# Altium PCB Blue_Clipper.PcbDoc
Units mil, origin at the board's own origin, x right, y up, seen from the top; angles counter-clockwise.
Board outline 3149.23 x 1200 mil, 2 copper layers (Top Layer, Bottom Layer); 18 components, 10 nets, 39 pads, 79 vias.
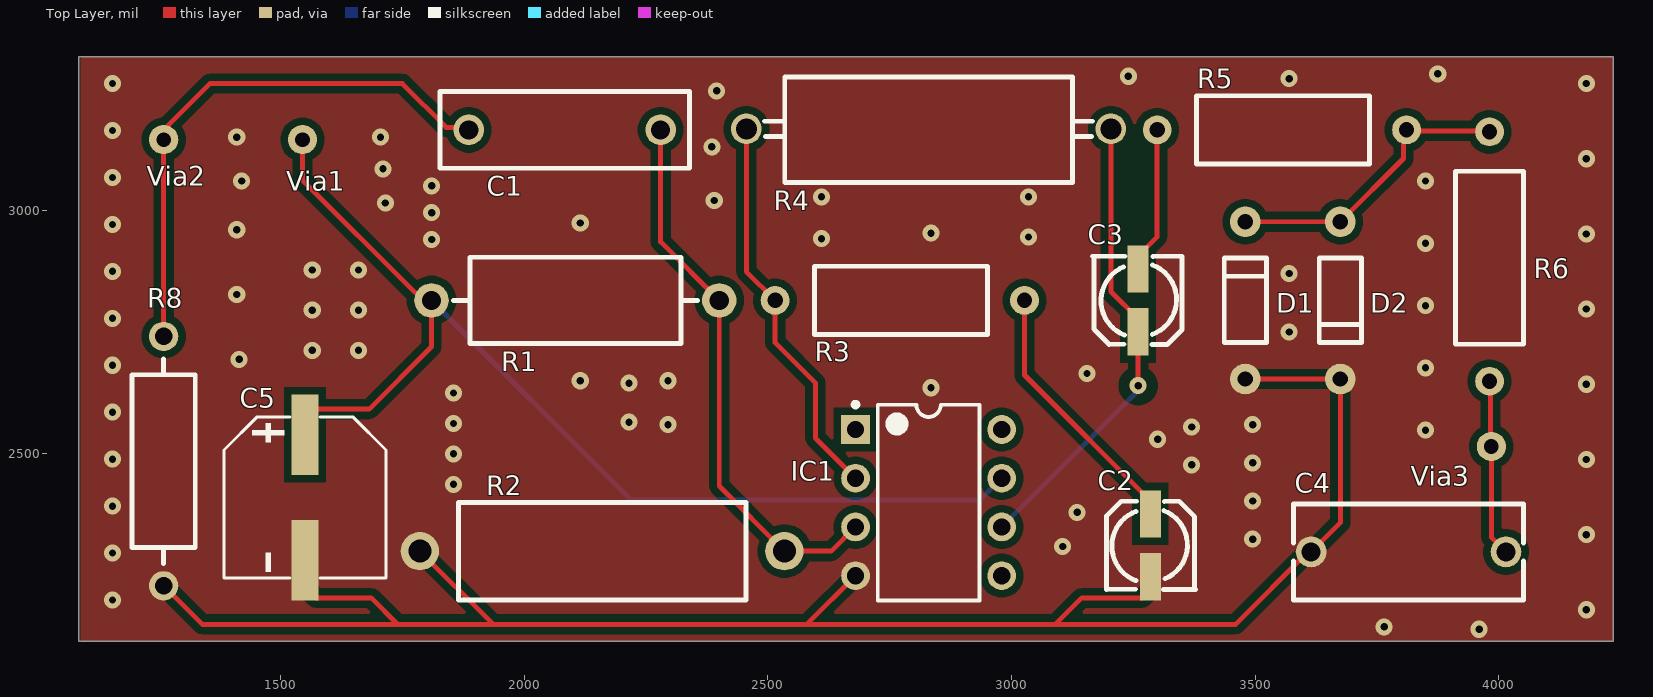
[diagram p0: Top Layer view]
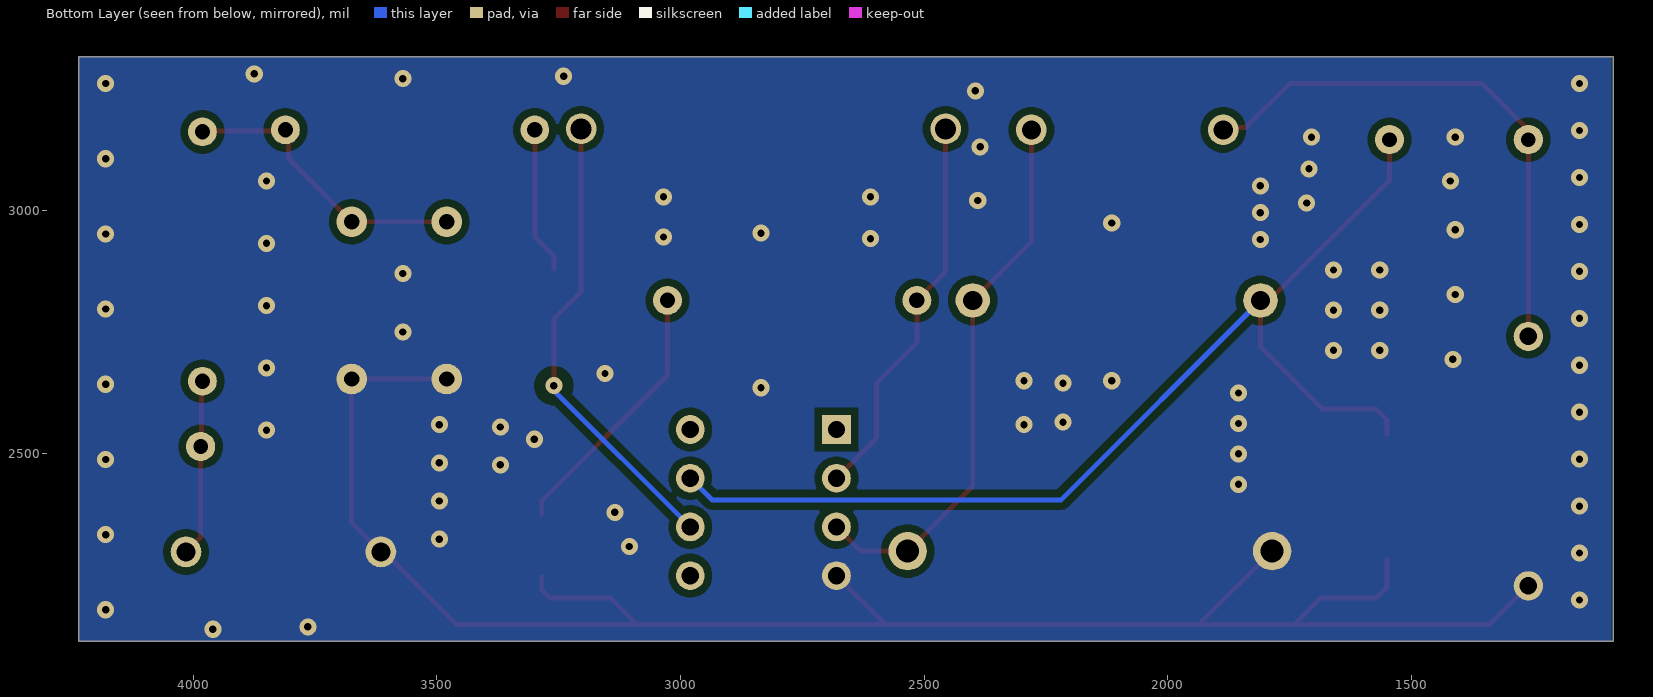
[diagram p1: Bottom Layer view, seen from below]

## Layer stack, top to bottom
Top Solder: solder mask 0.4, Solder Resist, Dk 3.5
Top Layer: signal copper 1.4
Dielectric 1: dielectric 12.6, FR-4, Dk 4.8
Bottom Layer: signal copper 1.4
Bottom Solder: solder mask 0.4, Solder Resist, Dk 3.5

## Board outline
1085.77,2115 1085.77,3315 4235,3315 4235,2115

## Design rules (kind name [scope] priority, off if disabled: settings)
Clearance [All] p1: gap=10 ignorepadtopadclearanceinfootprint=FALSE except(15: Arc-Poly Track-Poly SMDPad-Poly THPad-Poly Via-Poly Fill-Poly Poly-Poly)
PolygonConnect [All] p1: connectstyle=Direct reliefconductorwidth=10 reliefentries=4 polygonreliefangle="90 Angle" airgapwidth=10
RoutingVias [All] p1: holewidth=28 width=50 viastyle="Through Hole" minholewidth=28 minwidth=50 maxholewidth=28 maxwidth=50
SMDNeckDown [All] p1: percent=50.000
SilkToSilkClearance [All] p1: silktosilkclearance=0
SilkToSolderMaskClearance [IsPad] p1: minsilkscreentomaskgap=0 clearancetoexposedcopper=TRUE
SolderMaskExpansion [All] p1: expansion=4 istentingtop=FALSE
SupplyNets "Schematic Supply Nets" [InNet('GND')] p1: voltage=0.000
Width [All] p1: maxlimit=100 minlimit=6 preferedwidth=10
28 further rules are at their usual default settings.

## Components (designator, comment, footprint, x,y, rotation, side; value= is the part's Value field where it differs from the comment)
C1 "47nF" 47nF 2083.15,3165 r0 top
C2 "4.7uF" 4.7uF 3285,2312.28 r90 top
C3 "4.7uF" 4.7uF 3260,2814.99 r270 top
C4 "33nF" 33nF 3815,2298.7 r0 top
C5 "100uF" 100nF 1550,2410.58 r270 top
D1 "1N914BTR" DO-35_BD2.0-L4.2-P8.20-D0.5-RD 3480,2815 r270 top
D2 "1N914BTR" DO-35_BD2.0-L4.2-P8.20-D0.5-RD 3675,2815 r90 top
IC1 "TL071ACP" P0008A 2830,2400 r0 top
R1 "200kΩ" 200K 2105,2814.8 r180 top
R2 "240kΩ" 240K 2160,2300.28 r0 top
R3 "150Ω" 150 2770.9,2815 r0 top
R4 "150kΩ" 150K 2830,3166.97 r180 top
R5 "8.2kΩ" 8K2 3555,3165 r0 top
R6 "10kΩ" 10K 3981.22,2905 r270 top
R8 "2.2MΩ" 2.2M 1260,2485.18 r90 top
Via1 "9V positive" PCBComponent_1 1545,3145 r90 top
Via2 "Footswith1" PCBComponent_1 1260,3145 r90 top
Via3 "Footswitch2" PCBComponent_1 3985,2515 r90 top

## Footprints (in the part's own frame and the unit in brackets; to place one, negate y for a bottom-side part, rotate by r counter-clockwise, add the part's x,y. Pads: shape width x height; smd on the part's side, far side on the other; paste and mask are expansions set on the pad)
2.2M [mil] "2.2M"
  round 60 hole 36: 1(-255.91,0) 2(255.9,0)
  silkscreen extent -210,-65 210,65
4.7uF [mm]
  rect 2.46x1.1 smd: 1(1.64,0) 2(-1.64,0)
  silkscreen extent -2.3,-2.37 2.3,2.29
8K2 [mm]
  round 1.5 hole 0.8: 1(-6.5,0) 2(6.5,0)
  silkscreen extent -4.44,-1.78 4.57,1.78
10K [mm]
  round 1.5 hole 0.8: 1(-6.5,0) 2(6.5,0)
  silkscreen extent -4.44,-1.78 4.57,1.78
33nF [mm]
  round 1.6 hole 1: 1(-5.08,0) 2(5.08,0)
  silkscreen extent -6,-2.5 6,2.5
47nF [mm]
  round 1.6 hole 1: 1(-5,0) 2(5,0)
  silkscreen extent -6.5,-2 6.5,2
100nF [mm]
  rect 4.2x1.4 smd: 1(-3.267,0) 2(3.267,0)
  silkscreen extent -4.2,-4.23 4.2,4.23
150 [mm]
  round 1.5 hole 0.8: 1(-6.5,0) 2(6.5,0)
  silkscreen extent -4.44,-1.78 4.57,1.78
150K [mm]
  round 1.6 hole 1.1: 1(-9.5,0) 2(9.5,0)
  silkscreen extent -8.55,-2.7 8.55,2.8
200K [mm]
  round 1.8 hole 1: 1(-7.5,0) 2(7.5,0)
  silkscreen extent -6.37,-2.25 6.37,2.24
240K [mm]
  round 2 hole 1.2 paste-2539.97 mask+0.05: 1(-9.5,0) 2(9.5,0)
  silkscreen extent -7.49,-2.54 7.49,2.54
DO-35_BD2.0-L4.2-P8.20-D0.5-RD [mm]
  round 1.6 hole 0.8: 1(-4.1,0) 2(4.1,0)
  silkscreen extent -2.2,-1.1 2.2,1.1
P0008A [mm] "DIP, 8-Leads, Body 10.15x6.6mm, Pitch 2.54mm"
  rect 1.5x1.5 hole 0.9: 1(-3.81,3.81)
  round 1.5 hole 0.9: 2(-3.81,1.27) 3(-3.81,-1.27) 4(-3.81,-3.81) 5(3.81,-3.81) 6(3.81,-1.27) 7(3.81,1.27) 8(3.81,3.81)
  silkscreen extent -3.93,-5.1 2.65,5.23, body extent -3.95,-5.07 3.95,5.07, height 5.08
PCBComponent_1 [mil]
  round 60 hole 30: 1(0,0)

## Part data
C1: library part MPP473K2E1304095LC, JLCPCB Part Class="Extended Part", LCSC Part Name="47nF ±10%", Manufacturer=SRD(圣融达), Operating Temperature=-40℃~+85℃, Tolerance=±10%, Voltage Rated=-, Add into BOM=yes, Convert to PCB=yes, Datasheet=https://atta.szlcsc.com/upload/public/pdf/source/20190820/C412730_D7BCD9B1AADCF68DA4089841D58A28D3.pdf, Device=MPP473K2E1304095LC, Manufacturer Part=MPP473K2E1304095LC, Supplier=LCSC, Supplier Footprint=插件, Supplier Part=C109757, Symbol=MPP473K2130409LC
C2 C3: library part UUD1V4R7MCL1GS, Equivalent Series Resistance(ESR)=1.8Ω@100kHz, JLCPCB Part Class="Extended Part", LCSC Part Name="4.7uF ±20% 35V", Lifetime @ Temp=2000hrs@105℃, Manufacturer=Nichicon(尼吉康), Operating Temperature=-55℃~+105℃, Rated Voltage=35V, Ripple Current=80mA@100kHz, Tolerance=±20%, Add into BOM=yes, Convert to PCB=yes, Datasheet=https://atta.szlcsc.com/upload/public/pdf/source/20191118/C445283_CAA4D2A16DB999FCD0228FD197EA979A.pdf, Device=UUD1V4R7MCL1GS, L=6.1mm, Manufacturer Part=UUD1V4R7MCL1GS, Supplier=LCSC, Supplier Footprint=SMD,D4xL5.8mm, Supplier Part=C445250, Symbol=UUD1V4R7MCL1GS, φD=4mm
C4: library part KP333J2J1001, JLCPCB Part Class="Extended Part", LCSC Part Name="33nF ±5% 630V", Manufacturer=KYET(科雅), Operating Temperature=-40℃~+100℃, Tolerance=±5%, Voltage Rated=630V, Add into BOM=yes, Convert to PCB=yes, Datasheet=https://atta.szlcsc.com/upload/public/pdf/source/20190521/C390075_294CBABFDD83AEA9E31C0E739F669EAE.pdf, Device=KP333J2J1001, Manufacturer Part=KP333J2J1001, Supplier=LCSC, Supplier Footprint=插件,P=10mm, Supplier Part=C390075, Symbol=KP333J2J1001
C5: library part 50TZV100M8X10.5, Equivalent Series Resistance(ESR)=-, JLCPCB Part Class="Extended Part", LCSC Part Name="100uF ±20% 50V", Lifetime @ Temp=2000hrs@105℃, Manufacturer=rubycon(红宝石), Operating Temperature=-55℃~+105℃, Rated Voltage=50V, Ripple Current=350mA@100kHz, Tolerance=±20%, Add into BOM=yes, Convert to PCB=yes, Datasheet=https://atta.szlcsc.com/upload/public/pdf/source/20211104/B1322EC361622DC9F2E8A8FE84CAD829.pdf, Device=50TZV100M8X10.5, L=10.5mm, Manufacturer Part=50TZV100M8X10.5, Supplier=LCSC, Supplier Footprint=SMD,D8xL10.5mm, Supplier Part=C2843277, Symbol=50TZV100M8X10.5, φD=8mm
D1 D2: Forward Voltage (Vf@If)=1V@100mA, JLCPCB Part Class="Extended Part", LCSC Part Name="电压:100V 电流:200mA", Manufacturer=onsemi(安森美), Operating Temperature=-55℃~+175℃@(Tj), Rectified Current=200mA, Reverse Leakage Current=5uA@75V, Reverse Voltage (Vr)=100V, Add into BOM=yes, Convert to PCB=yes, Datasheet=https://atta.szlcsc.com/upload/public/pdf/source/20180829/C258180_CB6548A256F883C48C8DDA869B34246C.pdf, Device=1N914BTR, Diode Configuration=-, Manufacturer Part=1N914BTR, Reverse Recovery Time (trr)=4ns, Supplier=LCSC, Supplier Footprint=DO-35, Supplier Part=C258180, Symbol=1N914BTR
IC1: library part CMP-0017-00976-2, "Low-Noise JFET-Input Operational Amplifier, 7 to 36 V, 0 to 70 degC, 8-pin DIP (P8), Pb-Free (RoHS)", Manufacturer="Texas Instruments", Rating=Catalog, Total Supply Voltage(Max)(+5V is 5, +/-5V is 10)=36, Total Supply Voltage(Min)(+5V is 5, +/-5V is 10)=7, CMRR(Min)(dB)=75, Code_JEDEC=MS-001, ComponentLink1Description="Manufacturer URL", ComponentLink1URL=http://www.ti.com/, ComponentLink2Description=Datasheet, ComponentLink2URL=http://www.ti.com/lit/ds/symlink/tl071a.pdf, ComponentLink3Description="Package Specification", ComponentLink3URL=http://www.ti.com/litv/pdf/mpdi001b, DatasheetVersion=SLOS080J, Eco-Plan="Pb-Free (RoHS)", GBW(Typ)(MHz)=3, IIB(Max)(pA)=200, Iq per channel(Max)(mA)=2.5, Mounting Technology="Through Hole", Number of Channels=1, Offset Drift(Typ)(uV/C)=18, PackageDescription="8-Pin Plastic In-Line, Body 9.59 x 6.35 mm, Pitch 2.54 mm", PackageReference=P0008A, PackageVersion="4040082/E, 04/2010", PartNumber=TL071ACP, Slew Rate(Typ)(V/us)=13, Sub Family="General Purpose Amplifier, High Supply Voltage Amplifier (>=30V)", Vio (25C)(Max)(mV)=6, Vn at 1kHz(Typ)(nV/rtHz)=18
R1: library part CR1W-200K±5%-TT52, "200K", JLCPCB Part Class="Extended Part", LCSC Part Name="碳膜电阻 200kΩ ±5% 1W", Manufacturer=VO(翔胜), Operating Temperature Range=-55℃~+155℃, Overload Voltage (Max)=500V, Power(Watts)=1W, Temperature Coefficient=±350ppm/℃, Tolerance=±5%, Add into BOM=yes, Convert to PCB=yes, Datasheet=https://atta.szlcsc.com/upload/public/pdf/source/20210803/C2857407_45FF53FE186CAB545115AD37303966CD.pdf, Device=CR1W-200K±5%-TT52, Manufacturer Part=CR1W-200K±5%-TT52, Supplier=LCSC, Supplier Footprint=插件,D4.5xL11mm, Supplier Part=C2897140, Symbol=CR1W-200K±5%-TT52, Type=碳膜电阻
R2: library part MO2W-240K±5%-9T73, "240K", JLCPCB Part Class="Extended Part", LCSC Part Name="金属氧化膜电阻 240kΩ ±5% 2W", Manufacturer=VO(翔胜), Operating Temperature Range=-55℃~+155℃, Overload Voltage (Max)=400V, Power(Watts)=2W, Temperature Coefficient=±350ppm/℃, Tolerance=±5%, Add into BOM=yes, Convert to PCB=yes, Datasheet=https://atta.szlcsc.com/upload/public/pdf/source/20200622/C479426_3144C92B6E787A18688D073F1B971656.pdf, Device=MO2W-240K±5%-9T73, Manufacturer Part=MO2W-240K±5%-9T73, Supplier=LCSC, Supplier Footprint=插件,D5xL15mm, Supplier Part=C601791, Symbol=MO2W-240K±5%-9T73, Type=金属氧化膜电阻
R3: library part CR1/2W-150Ω±5%-XT52, "150", JLCPCB Part Class="Extended Part", LCSC Part Name="碳膜电阻 150Ω ±5% 500mW 0.5镀锡铁脚 编带内跨距52MM", Manufacturer=VO(翔胜), Operating Temperature=-55℃~+155℃, Power(Watts)=500mW, Temperature Coefficient=±350ppm/℃, Tolerance=±5%, Voltage-Supply(Max)=350V, Add into BOM=yes, Convert to PCB=yes, Datasheet=https://atta.szlcsc.com/upload/public/pdf/source/20210803/C2857407_45FF53FE186CAB545115AD37303966CD.pdf, Device=CR1/2W-150Ω±5%-XT52, Manufacturer Part=CR1/2W-150Ω±5%-XT52, Supplier=LCSC, Supplier Footprint=插件,D3.5xL9mm, Supplier Part=C2894481, Symbol=CR1/2W-150Ω±5%-XT52, Type=碳膜电阻
R4: library part MFR03SF1503A10, "150K", JLCPCB Part Class="Extended Part", LCSC Part Name="150kΩ ±1% 3W 金属膜电阻 小体积,铜脚，圆柱状直插", Manufacturer=UNI-ROYAL(厚声), Power(Watts)=3W, Temperature Coefficient=±50ppm/℃, Tolerance=±1%, Voltage-Supply(Max)=500V, Add into BOM=yes, Convert to PCB=yes, Datasheet=https://atta.szlcsc.com/upload/public/pdf/source/20191012/C436293_8820AA14BC71FA35E551C06C441482A0.pdf, Device=MFR03SF1503A10, Manufacturer Part=MFR03SF1503A10, Supplier=LCSC, Supplier Footprint=插件,D5xL15.5mm, Supplier Part=C89944, Symbol=MFR03SF1503A10, Type=金属膜电阻
R5: library part CR1/2W-8K2±5%-2T52, "8.2K", JLCPCB Part Class="Extended Part", LCSC Part Name="碳膜电阻 8.2kΩ ±5% 500mW 0.5镀锡铜脚 编带内跨距52MM", Manufacturer=VO(翔胜), Operating Temperature=-55℃~+155℃, Power(Watts)=500mW, Temperature Coefficient=±350ppm/℃, Tolerance=±5%, Voltage-Supply(Max)=350V, Add into BOM=yes, Convert to PCB=yes, Datasheet=https://atta.szlcsc.com/upload/public/pdf/source/20210803/C2857407_45FF53FE186CAB545115AD37303966CD.pdf, Device=CR1/2W-8K2±5%-2T52, Manufacturer Part=CR1/2W-8K2±5%-2T52, Supplier=LCSC, Supplier Footprint=插件,D3.5xL9mm, Supplier Part=C2894471, Symbol=CR1/2W-8K2±5%-2T52, Type=碳膜电阻
R6: library part CR1/2W-10K±5%-2T52, "10K", JLCPCB Part Class="Extended Part", LCSC Part Name="碳膜电阻 10kΩ ±5% 500mW 0.5镀锡铜脚 编带内跨距52MM", Manufacturer=VO(翔胜), Operating Temperature=-55℃~+155℃, Power(Watts)=500mW, Temperature Coefficient=±350ppm/℃, Tolerance=±5%, Voltage-Supply(Max)=350V, Add into BOM=yes, Convert to PCB=yes, Datasheet=https://atta.szlcsc.com/upload/public/pdf/source/20210803/C2857407_45FF53FE186CAB545115AD37303966CD.pdf, Device=CR1/2W-10K±5%-2T52, Manufacturer Part=CR1/2W-10K±5%-2T52, Supplier=LCSC, Supplier Footprint=插件,D3.5xL9mm, Supplier Part=C2894384, Symbol=CR1/2W-10K±5%-2T52, Type=碳膜电阻
R8: library part "CF1/2W-2.2MΩ±5% T", "2.2M", JLCPCB Part Class="Extended Part", LCSC Part Name="2.2MΩ ±5% 500mW 碳膜电阻", Manufacturer=CCO(千志电子), Operating Temperature=-55℃~+155℃, Power(Watts)=500mW, Temperature Coefficient=±350ppm/℃, Tolerance=±5%, Voltage-Supply(Max)=350V, Add into BOM=yes, Convert to PCB=yes, Datasheet=https://atta.szlcsc.com/upload/public/pdf/source/20190910/C427328_A0A2D65F3FD547937F4E674C90868175.pdf, Device="CF1/2W-2.2MΩ±5% T", Manufacturer Part="CF1/2W-2.2MΩ±5% T", Supplier=LCSC, Supplier Footprint=插件,D3.2xL9mm, Supplier Part=C120318, Symbol="CF1/2W-2.2MΩ±5% T52", Type=碳膜电阻
Via1 Via2 Via3: library part Via

## Via types
v1: diameter 35, hole 15, Top Layer to Bottom Layer, 79 vias

## Nets (pads, with @x,y where several pads share a name; then routed paths per layer and width w, separated by ;. In a path a pad name is that pad's centre, name@x,y a point inside that pad or via, vN(x,y) a via of type N, cw(c..) or ccw(c..) an arc to the next point about the centre after c; other vN are vias at no path point)
GND: C2.2 C4.1 C5.2 D1.2 D2.1 IC1.4 R2.1 R8.1 | length 3909.9
  Top Layer w10: R8.1 1339.28,2150 1740,2150 ; C5.2 1550,2226.83 1572.56,2204.28 1685.72,2204.28 1740,2150 ; R2.1 1936.26,2150 1940,2150 ; IC1.4 2580,2150 ; C2.2 3285,2220.93 3268.35,2204.28 3144.28,2204.28 3090,2150 ; D1.2 D2.1 3675,2358.7 C4.1 3608.7,2298.7 3460,2150 3090,2150 ; 1740,2150 1940,2150 ; 1940,2150 2580,2150 ; 2580,2150 3090,2150
  other v1: 3960,2140 3765,2145 4180,2180 1155,2200 1155,2296.36 3105,2310 3495,2325 4180,2334.29 3135,2380 1155,2392.73 3495,2403.33 1855,2437.5 3370,2477.5 3495,2481.67 1155,2489.09 4180,2488.57 1855,2500 3300,2530 3850,2548.57 3370,2555 2295,2560 3495,2560 1855,2562.5 2215,2565 1155,2585.45 1855,2625 2835,2635.71 4180,2642.86 2215,2645 2115,2650 2295,2650 3155,2665 3850,2676.43 1155,2681.82 1415,2694 1565,2712.5 1660,2712.5 3570,2750 1155,2778.18 1565,2795 1660,2795 4180,2797.14 3850,2804.29 1410,2827 3570,2870 1155,2874.55 1565,2877.5 1660,2877.5 3850,2932.14 1810,2940 2610,2941.67 3035,2945 4180,2951.43 2835,2952.86 1410,2960 1155,2970.91 2115,2974 1810,2995 1715,3015 2390,3020 2610,3027.5 3035,3027.5 1810,3050 1420,3060 3850,3060 1155,3067.27 1710,3085 4180,3105.71 2385,3130 1410,3150 1705,3150 1155,3163.64 2395,3245 1155,3260 4180,3260 3570,3270 3240,3275 3875,3280
NetC1_1: C1.1 R8.2 Via2.1 | length 1128.9
  Top Layer w10: R8.2 Via2.1 1269.57,3154.57 1269.57,3174.57 1355,3260 1750,3260 1839.8,3170.2 1881.1,3170.2 C1.1
NetC1_2: C1.2 IC1.3 R1.1 R2.2 | length 1136.5
  Top Layer w10: C1.2 2280,2935.08 R1.1 2400.28,2434.01 R2.2 2630.28,2300.28 IC1.3
NetC2_1: C2.1 R3.2 | length 545.1
  Top Layer w10: R3.2 3026.81,2661.81 3285,2403.62 C2.1
NetC3_1: C3.1 IC1.6 R4.1 | length 956.1
  Top Layer w10: R4.1 3204.02,2833.18 3260,2777.2 C3.1 v1(3260,2640)
  Bottom Layer w10: IC1.6 3260,2630 v1(3260,2640)
NetC3_2: C3.2 R5.1 | length 301.6
  Top Layer w10: C3.2 3260,2906.35 3299.09,2945.44 R5.1
NetC4_2: C4.2 R6.2 Via3.1 | length 364.4
  Top Layer w10: R6.2 3983.11,2647.21 3983.11,2516.89 Via3.1 3985,2328.7 C4.2
NetC5_1: C5.1 IC1.7 R1.2 Via1.1 | length 2262.5
  Top Layer w10: Via1.1 1545,3061.84 1775.22,2831.62 1776.44,2831.62 R1.2@1800.88,2807.17 ; C5.1 1550,2569.21 1572.56,2591.77 1681.77,2591.77 1809.73,2719.73 R1.2 R1.2@1800.88,2805.96
  Bottom Layer w10: R1.2 2219.06,2405.47 2935.47,2405.47 IC1.7
NetD1_1: D1.1 D2.2 R5.2 R6.1 | length 611.9
  Top Layer w10: D1.1 D2.2 3804.71,3106.13 3804.71,3158.81 R5.2 3812.95,3162.95 3979.17,3162.95 R6.1
NetIC1_2: IC1.2 R3.1 R4.2 | length 809.8
  Top Layer w10: R4.2 2455.99,2874.01 R3.1 2514.99,2728.37 2597.5,2645.87 2597.5,2532.5 IC1.2
pads on no net: IC1.1 IC1.5 IC1.8

## Polygon pours and split planes (outlines as drawn)
GND on Top Layer "GND_L01_P004" (solid, remove dead copper, pour order 4): 1090.12,3314.88 1090.12,2114.98 1090.24,2114.86 1090.25,2114.88 4235.12,2114.88 4235.12,3314.77 4235.05,3314.85
GND on Bottom Layer "GND_L02_P003" (solid, remove dead copper, pour order 3): 1090,3315 1090,2115.1 1090.12,2114.98 1090.14,2115 4235,2115 4235,3314.89 4234.93,3314.97

## Silkscreen, mask and mechanical layers (free items; w line width, h text height)
Mechanical 1:
  the board outline again, w10